# EAGLE board pikachu_pcb (EAGLE 9.6.2)
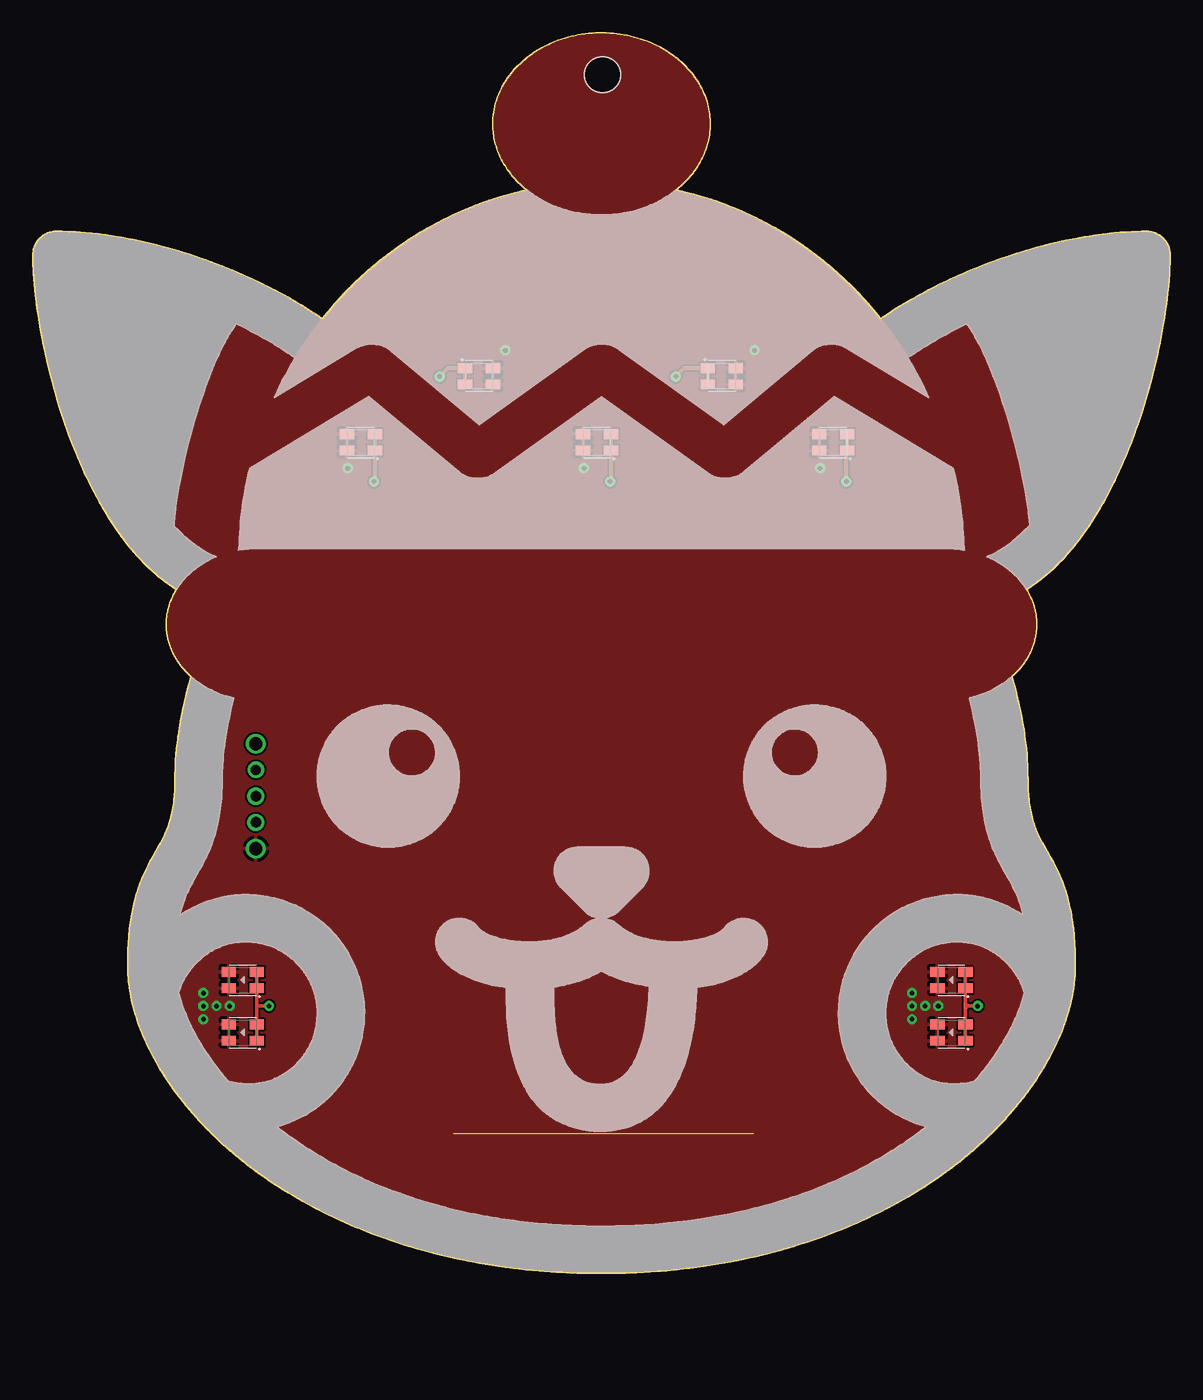
[diagram p0: board, top side]
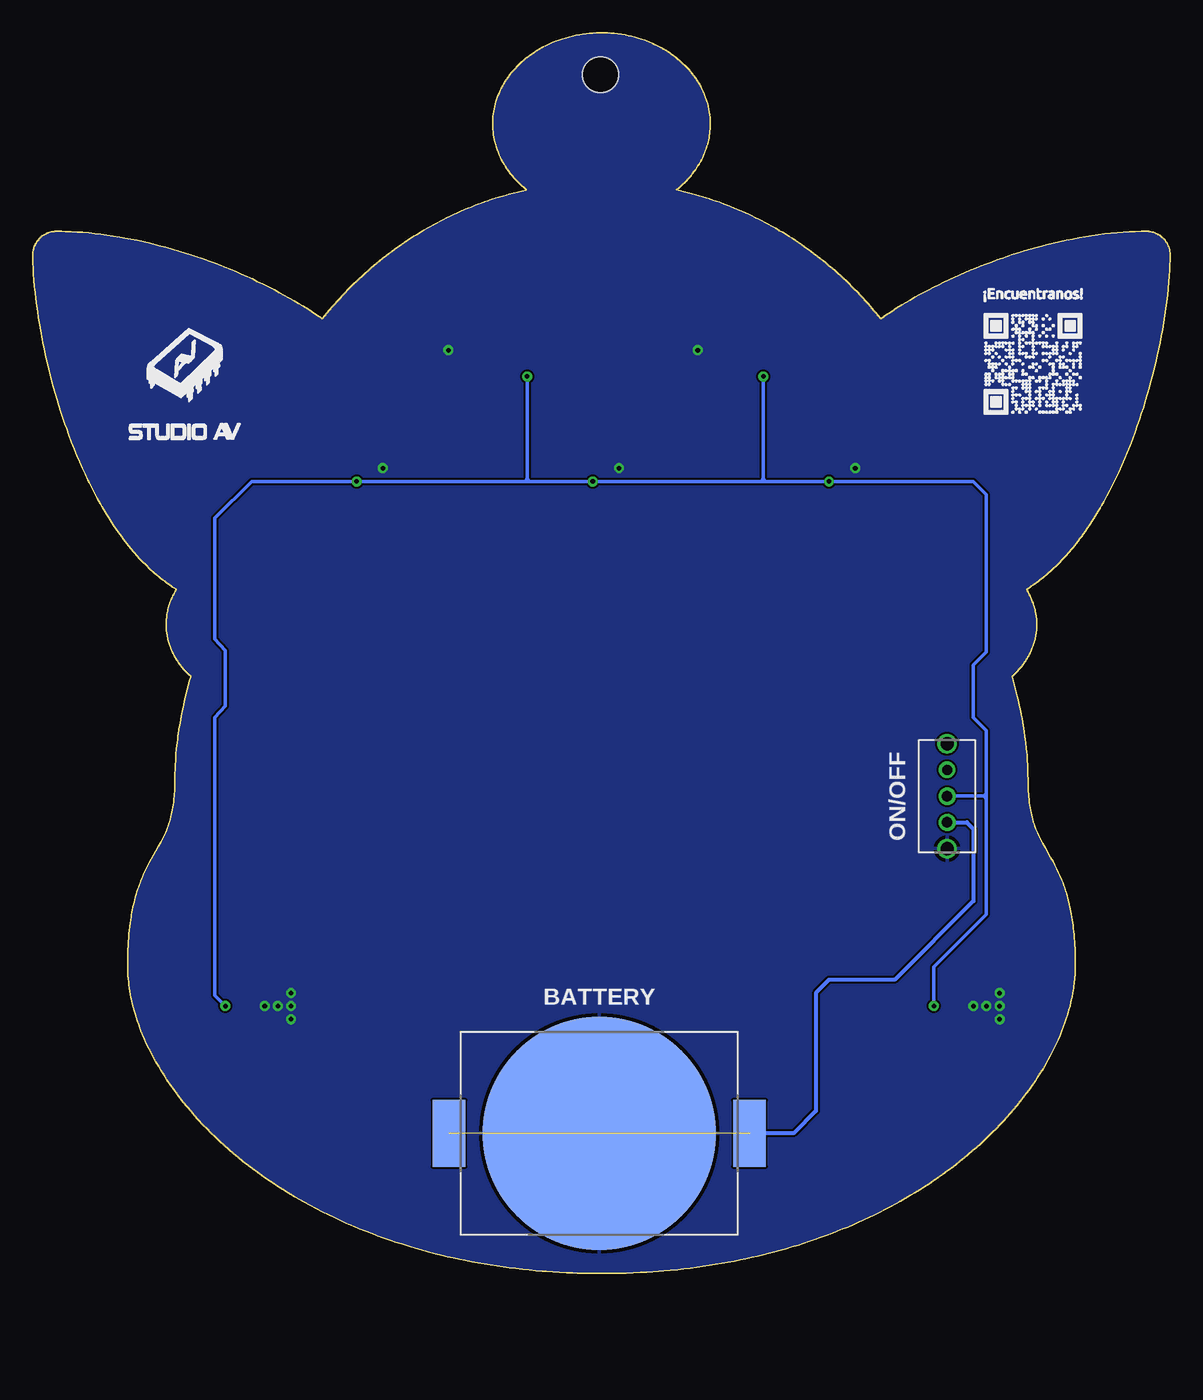
[diagram p1: board, bottom side, seen from below]

Size 86.67 x 94.59 mm. Coordinates in mm from the lower left corner, seen from the top.
Outline: 1136 segments
Copper layers (1*16): Top 0.035mm / dielectric 1.5mm / Bottom 0.035mm
Design rules "default *": minimum track width 10mil, minimum drill 0.35mm, track to track 6mil, track to pad 6mil, pad to pad 6mil, via to via 6mil, smd to smd 6mil, copper to edge 0mil, drill to drill 6mil, minimum pad ring 10mil, minimum via ring 8mil, stop-mask expansion 4mil, vias tented up to drill 0mil, thermal gap 10mil
Holes 2.75 mm at 43.4,91.39

## Footprints (pad centres in the part's own frame; a part is rotated, then mirrored left to right if it is on the bottom)
BATHLD001 = smd 2.5 x 5.1: 1 11.45,0; 2 -11.45,0 | smd 17.8 x 17.8: 3 0,0
SMD_RGB_LED_0807 = smd 1.1 x 0.75: 1 1.065,-0.635; 2 1.065,0.61; 3 -1.068,0.61; 4 -1.068,-0.635
18252321 = drill 0.8 pad 1.3: 1 0,0; 2 2,0 | drill 0.75 pad 1.2: 3 4,0 | drill 1 pad 1.5: MH1 -2,0; MH2 6,0

## Placement (x,y rotation side)
BATTERY  BAT-HLD-001  [BATHLD001]  43.5,10.69 0 bottom
D1  SMD_RGB_LED_FLASH  [SMD_RGB_LED_0807]  16,22.39 0 top
D2  SMD_RGB_LED_FLASH  [SMD_RGB_LED_0807]  16,18.39 0 top
D3  SMD_RGB_LED_FLASH  [SMD_RGB_LED_0807]  70,22.39 0 top
D4  SMD_RGB_LED_FLASH  [SMD_RGB_LED_0807]  70,18.39 0 top
D5  SMD_RGB_LED_FLASH  [SMD_RGB_LED_0807]  25,63.39 0 top
D6  SMD_RGB_LED_FLASH  [SMD_RGB_LED_0807]  43,63.39 0 top
D7  SMD_RGB_LED_FLASH  [SMD_RGB_LED_0807]  61,63.39 0 top
D8  SMD_RGB_LED_FLASH  [SMD_RGB_LED_0807]  34,68.39 180 top
D9  SMD_RGB_LED_FLASH  [SMD_RGB_LED_0807]  52.5,68.39 180 top
ON/OFF  1825232-1  [18252321]  17,34.39 90 bottom

## Library data of the parts
BATTERY = FL-Battery; DATASHEET: https://www.mouser.mx/datasheet/2/238/bat_hld_001-1659379.pdf; LCSC#PART: -; MANUFACTURER#PART: BAT-HLD-001-TR; MANUFACTURER_NAME: Linx Technologies; MOUSER#PART: 712-BAT-HLD-001-TR; PACKAGE: SMD
D1-D9 = FL-Led; DATASHEET: https://es.aliexpress.com/item/32829140495.html?spm=a2g0s.9042311.0.0.32vRd6; LCSC#PART: -; MANUFACTURER#PART: -; MANUFACTURER_NAME: -; MOUSER#PART: -; PACKAGE: 0807
ON/OFF = 1825232-1; ARROW_PART_NUMBER: 1825232-1; ARROW_PRICE-STOCK: https://www.arrow.com/en/products/1825232-1/te-connectivity; DESCRIPTION: TE CONNECTIVITY - 1825232-1 - SLIDE SWITCH, SPDT, 0.2A, 30VDC, SOLDER; HEIGHT: 3.7mm; MANUFACTURER_NAME: TE Connectivity; MANUFACTURER_PART_NUMBER: 1825232-1; MOUSER_PART_NUMBER: 655-1825232-1; MOUSER_PRICE-STOCK: https://www.mouser.co.uk/ProductDetail/TE-Connectivity-PB/1825232-1?qs=kTKVN3NWb5FosGxaNC1%252BtA%3D%3D

## Nets
GND: BATTERY.3 D1.3 D1.4 D2.3 D2.4 D3.3 D3.4 D4.3 D4.4 D5.3 D5.4 D6.3 D6.4 D7.3 D7.4 D8.3 D8.4 D9.3 D9.4 ON/OFF.MH1
N$3: ON/OFF.MH2
VBB: BATTERY.1 BATTERY.2 ON/OFF.1
VCC: D1.1 D1.2 D2.1 D2.2 D3.1 D3.2 D4.1 D4.2 D5.1 D5.2 D6.1 D6.2 D7.1 D7.2 D8.1 D8.2 D9.1 D9.2 ON/OFF.2

## Tracks (layer width: path | path; a pad name or v marks a point on that pad's centre or on a via)
GND  (via drill 0.35)
  other vias: 15,20.39 14,20.39 13,20.39 13,21.39 13,19.39 67,21.39 67,20.39 67,19.39 69,20.39 68,20.39 42,61.39 60,61.39 24,61.39 55,70.39 36,70.39
  pour Bottom (rank 3): 1136 corners
  pour Top (rank 3): 1186 corners
  pour Top (rank 3): 224 corners
  pour Top (rank 3): 223 corners
VBB  (1 unrouted)
  Bottom 0.305: BATTERY.1 28.7,10.69 27,12.39 27,21.39 26,22.39 21,22.39 15,28.39 15,33.89 15.5,34.39 ON/OFF.1
VCC  (via drill 0.35)
  Top 0.254: D1.2 D1.1 17.06,20.39 | 17.06,20.39 D2.2 D2.1 | 71.06,20.59 D3.1 D3.2 | 71.06,20.59 71.06,20.39 | 71.06,20.19 D4.2 D4.1 | 71.06,20.19 71.06,20.39 | v72,20.39 71.26,20.39 | 71.26,20.39 71.06,20.39 | 71.06,20.19 71.26,20.39 | 71.26,20.39 71.06,20.59 | 17.06,20.39 v18,20.39 | v26,60.39 26.06,60.45 D5.1 D5.2 | v44,60.39 44.06,60.45 D6.1 D6.2 | v49,68.39 49.63,69.02 D9.1 D9.2 | v31,68.39 31.63,69.02 D8.1 D8.2 | v62,60.39 62,62.69 D7.1 D7.2
  Bottom 0.254: ON/OFF.2 14.2,36.39 | 14.2,36.39 14,36.39 | 14,36.19 14,27.39 18,23.39 v18,20.39 | 14,36.19 14,36.39 | 14,36.59 14,41.39 15,42.39 15,46.39 14,47.39 14,59.39 15,60.39 v26,60.39 30.8,60.39 | 14,36.59 14,36.39 | 31.2,60.39 v44,60.39 48.8,60.39 | 31.2,60.39 31,60.39 | 31,60.39 30.8,60.39 | 48.8,60.39 49,60.39 | 49,60.39 49.2,60.39 | 49.2,60.39 v62,60.39 70,60.39 72.8,57.59 72.8,48.39 72,47.5 72,43.28 72.8,42.39 72.8,21.19 v72,20.39 | v31,68.39 31,60.59 | 31,60.39 31,60.59 | v49,68.39 49,60.59 | 49,60.59 49,60.39 | 48.8,60.39 49,60.59 | 49,60.59 49.2,60.39 | 31,60.59 30.8,60.39 | 31,60.59 31.2,60.39 | 14.2,36.39 14,36.19 | 14.2,36.39 14,36.59